# Altium PCB PCB_2023-03-13.pcbdoc
Units mil, origin at the board's own origin, x right, y up, seen from the top; angles counter-clockwise.
Board outline 3940 x 3010 mil, 2 copper layers (Top Layer, Bottom Layer); 27 components, 54 nets, 131 pads, 35 vias.
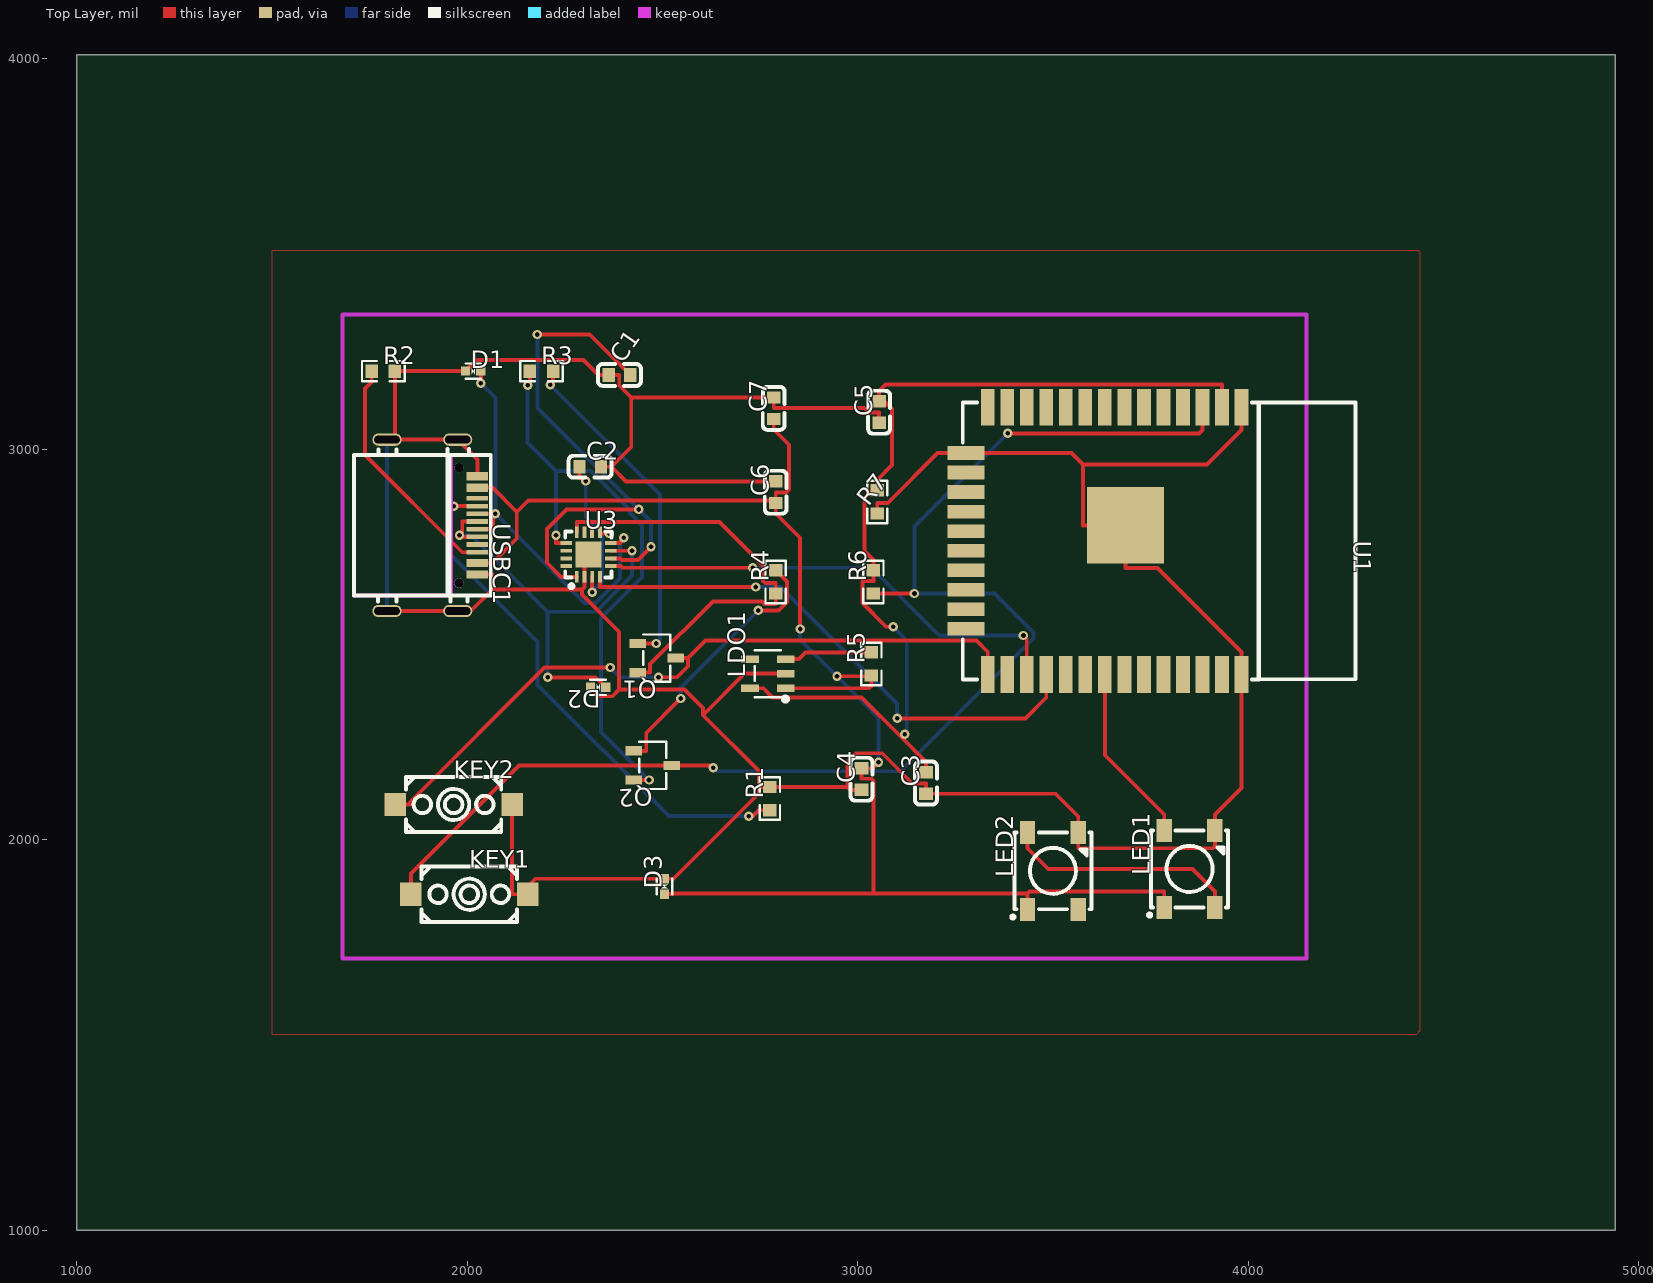
[diagram p0: Top Layer view]
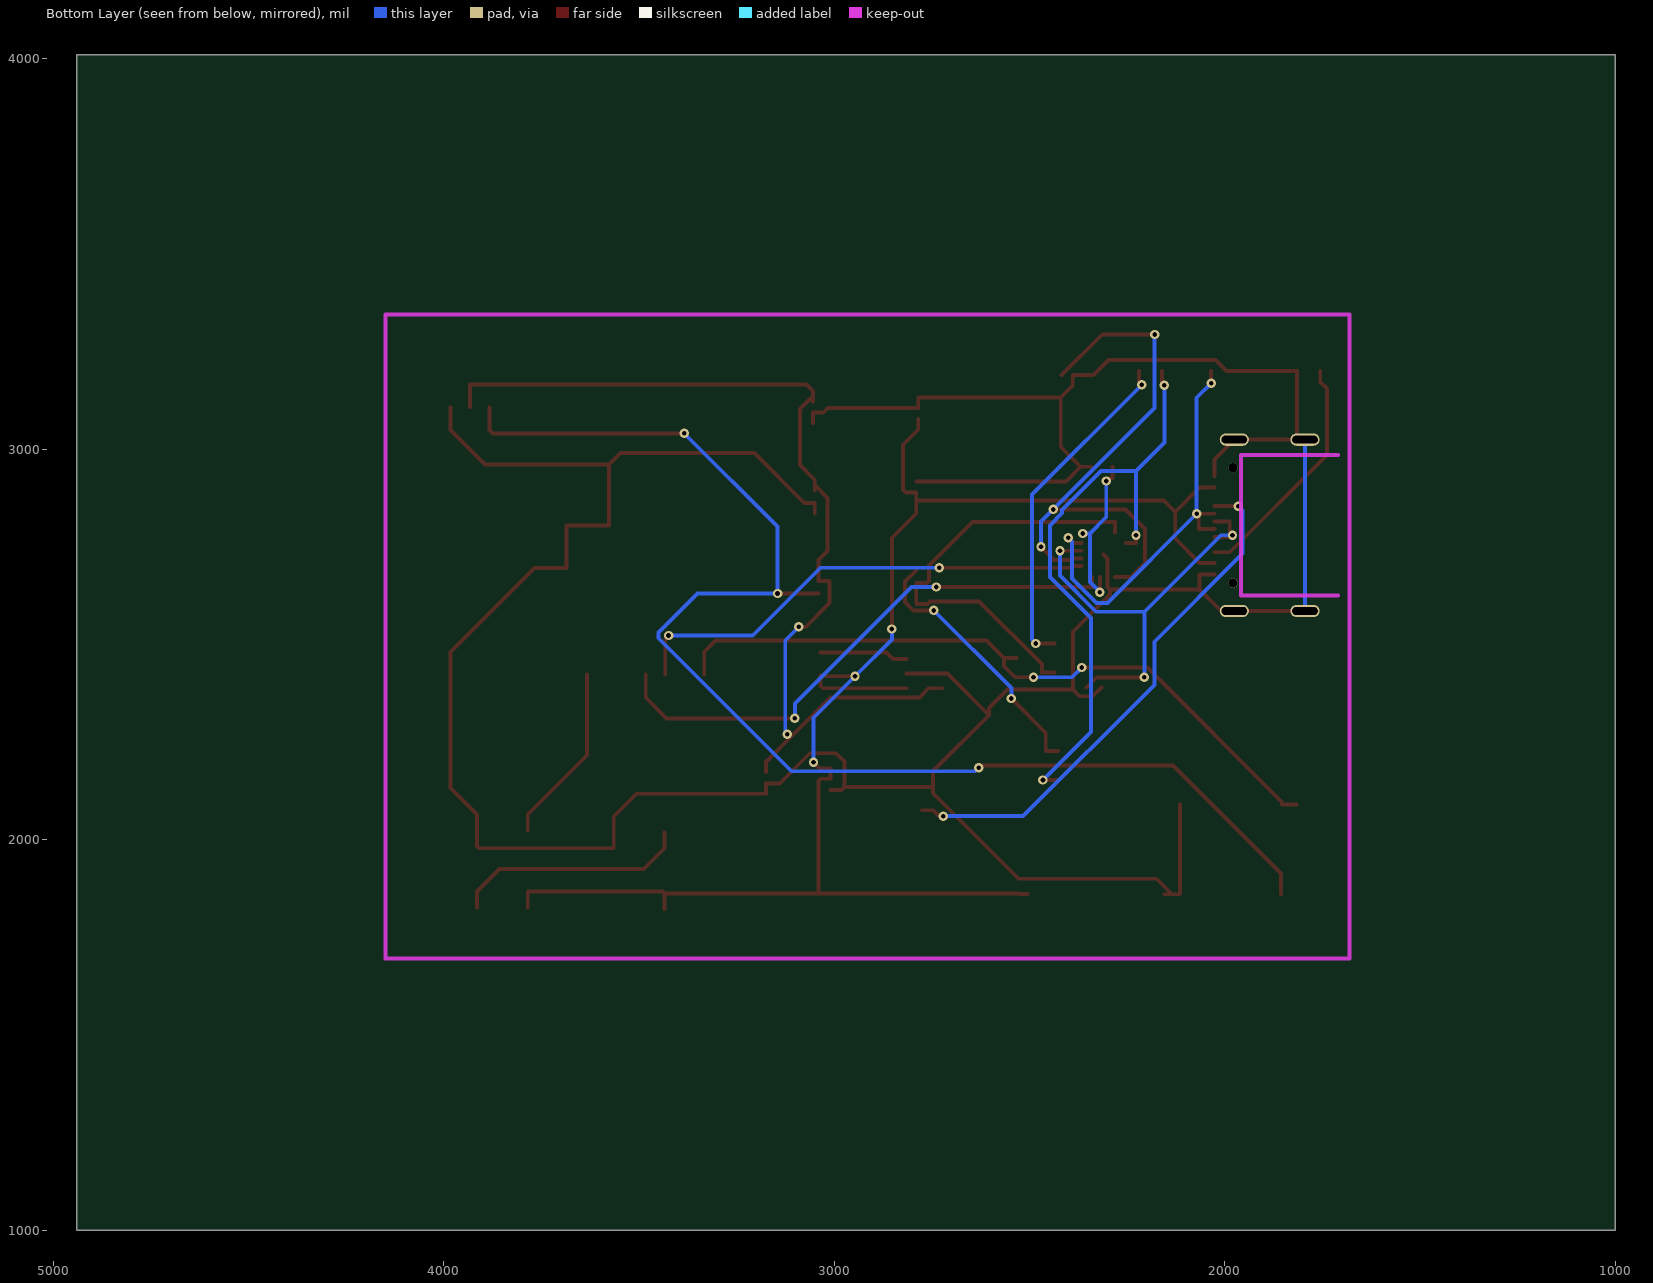
[diagram p1: Bottom Layer view, seen from below]

## Layer stack, top to bottom
Top Layer: signal copper (thickness not stored)
Dielectric: dielectric 12.6, FR-4, Dk 4.8
Bottom Layer: signal copper (thickness not stored)

## Board outline
4940,1000 1000,1000 1000,4010 4940,4010

## Components (designator, comment, footprint, x,y, rotation, side; value= is the part's Value field where it differs from the comment)
C1 "100uF" C0603 2390,3190 r0 top
C2 "10uF" C0603 2315,2955 r0 top
C3 "10uF" C0603 3175,2145 r90 top
C4 "10uF" C0603 3010,2155 r90 top
C5 "100uF" C0603 3055,3095 r90 top
C6 "0.1uF" C0603 2790,2890 r90 top
C7 "0.1uF" C0603 2785,3105 r90 top
D1 "BDFN2C051V" X1SON-2_L1.0-W0.6-P0.65-BI 2015,3200 r0 top
D2 "BDFN2C051V" X1SON-2_L1.0-W0.6-P0.65-BI 2335,2390 r180 top
D3 "BDFN2C051V" X1SON-2_L1.0-W0.6-P0.65-BI 2505,1880 r90 top
KEY1 "K2-3.6×6.1_SMD" KEY-SMD_2P-L6.2-W3.6-LS8.0 2005,1860 r0 top
KEY2 "K2-3.6×6.1_SMD" KEY-SMD_2P-L6.2-W3.6-LS8.0 1965,2090 r0 top
LDO1 "ME6211C33M5G-N" SOT-23-5_L3.0-W1.7-P0.95-LS2.8-BL 2770,2425 r90 top
LED1 "WS2812B-B" LED-SMD_4P-L5.0-W5.0-BL_TC5050RGB 3850,1925 r90 top
LED2 "WS2812B-B" LED-SMD_4P-L5.0-W5.0-BL_TC5050RGB 3500,1920 r90 top
Q1 "S8050_C105433" SOT-23-3_L2.9-W1.6-P1.90-LS2.8-BR 2485,2465 r180 top
Q2 "S8050_C105433" SOT-23-3_L2.9-W1.6-P1.90-LS2.8-BR 2475,2190 r180 top
R1 "5.1k" R0603 2775,2105 r90 top
R2 "5.1k" R0603 1785,3200 r0 top
R3 "10k" R0603 2190,3200 r0 top
R4 "10k" R0603 2790,2660 r90 top
R5 "10k" R0603 3035,2450 r90 top
R6 "10k" R0603 3040,2660 r90 top
R7 "10k" R0603 3050,2865 r90 top
U1 "ESP32-WROOM-32(8MB)" WIFIM-SMD_39P-L25.5-W18.0-P1.27 3630,2765 r270 top
U3 "CH343P" TQFN-16_L3.0-W3.0-P0.50-BL-EP1.7 2310,2730 r0 top
USBC1 "TYPE-C-31-M-14" USB-C-SMD_12P-P0.50-H-F_TYPE-C-31-M-14 1910,2805 r270 top

## Footprints (in the part's own frame and the unit in brackets; to place one, negate y for a bottom-side part, rotate by r counter-clockwise, add the part's x,y. Pads: shape width x height; smd on the part's side, far side on the other; paste and mask are expansions set on the pad)
C0603 [mm]
  rect 0.8x0.9 smd: 1(-0.7,0) 2(0.7,0)
  silkscreen extent -1.41,-0.71 1.39,0.72
KEY-SMD_2P-L6.2-W3.6-LS8.0 [mm]
  rect 1.4x1.5 smd: 1(-3.8,0) 2(3.8,0)
  silkscreen extent -3.1,-1.8 3.1,1.8
LED-SMD_4P-L5.0-W5.0-BL_TC5050RGB [mm]
  rect 1.5x1 smd: 1(-2.5,1.65) 2(-2.5,-1.65) 3(2.5,-1.65) 4(2.5,1.65)
  silkscreen extent -3.1,-2.5 2.5,2.7
R0603 [mil]
  rect 31.75x34.02 smd: 1(-29.66,0) 2(29.66,0)
  silkscreen extent -55,-26 55,26
SOT-23-3_L2.9-W1.6-P1.90-LS2.8-BR [mm]
  rect 1.07x0.6 smd: 1(1.235,-0.95) 2(1.235,0.95) 3(-1.235,0)
  silkscreen extent -0.88,-1.54 0.88,1.54
SOT-23-5_L3.0-W1.7-P0.95-LS2.8-BL [mm]
  rect 0.49x1.157 smd: 1(-0.95,-1.154) 2(0,-1.154) 3(0.95,-1.154)
  rect 0.49x1.175 smd: 4(0.95,1.154) 5(-0.95,1.154)
  silkscreen extent -1.8,-1.29 1.53,0.85
TQFN-16_L3.0-W3.0-P0.50-BL-EP1.7 [mm]
  rect 0.25x0.75 smd: 1(-0.748,-1.45) 2(-0.249,-1.45) 3(0.252,-1.45) 4(0.751,-1.45) 9(0.75,1.45) 10(0.25,1.45) 11(-0.25,1.45) 12(-0.749,1.45)
  rect 0.75x0.25 smd: 5(1.45,-0.75) 6(1.45,-0.25) 7(1.45,0.25) 8(1.45,0.75) 13(-1.45,0.75) 14(-1.45,0.25) 15(-1.45,-0.25) 16(-1.45,-0.75)
  rect 1.7x1.7 smd: 17(0,0)
  silkscreen extent -1.5,-2.17 1.5,1.5
USB-C-SMD_12P-P0.50-H-F_TYPE-C-31-M-14 [mm]
  rect 0.55x1.4 smd: A1B12(-3.2,2.94) A4B9(-2.45,2.94) B1A12(3.2,2.94) B4A9(2.45,2.94)
  rect 0.3x1.4 smd: A5(-1.249,2.94) A6(-0.251,2.94) A7(0.25,2.94) A8(1.25,2.94) B5(1.75,2.94) B6(0.75,2.94) B7(-0.751,2.94) B8(-1.749,2.94)
  oval 0.8x1.9 hole 0.5 slot 1.65 at 90 deg: S(-5.575,1.66) S(-5.575,-2.94) S(5.575,1.66) S(5.575,-2.94)
  round 0.6 hole 0.6 unplated: ""(-3.75,1.74) ""(3.75,1.74)
  Keep-Out Layer lines w0.254: 4.572,-5.1 4.572,1.215 4.445,1.215 -4.572,1.215 -4.572,-5.1
  silkscreen extent -4.95,-5.08 4.95,3.81
WIFIM-SMD_39P-L25.5-W18.0-P1.27 [mm]
  rect 2.4x0.9 smd: 1(-8.7,8.965) 2(-8.7,7.695) 3(-8.7,6.425) 4(-8.7,5.155) 5(-8.7,3.885) 6(-8.7,2.615) 7(-8.7,1.345) 8(-8.7,0.075) 9(-8.7,-1.195) 10(-8.7,-2.465) 11(-8.7,-3.735) 12(-8.7,-5.005) 13(-8.7,-6.275) 14(-8.7,-7.545) 25(8.7,-7.545) 26(8.7,-6.275) 27(8.7,-5.005) 28(8.7,-3.735) 29(8.7,-2.465) 30(8.7,-1.195) 31(8.7,0.075) 32(8.7,1.345) 33(8.7,2.615) 34(8.7,3.885) 35(8.7,5.155) 36(8.7,6.425) 37(8.7,7.695) 38(8.7,8.965)
  rect 0.9x2.4 smd: 15(-5.715,-8.965) 16(-4.445,-8.965) 17(-3.175,-8.965) 18(-1.905,-8.965) 19(-0.635,-8.965) 20(0.635,-8.965) 21(1.905,-8.965) 22(3.175,-8.965) 23(4.445,-8.965) 24(5.715,-8.965)
  rect 5x5 smd: 39(-1.017,1.422)
  silkscreen extent -9.02,-9.17 9.02,16.39
X1SON-2_L1.0-W0.6-P0.65-BI [mm]
  rect 0.6x0.6 smd: 1(-0.5,0) 2(0.5,0)
  silkscreen extent -0.5,-0.5 0.5,0.5

## Via types
v1: diameter 24, hole 12, Top Layer to Bottom Layer, tented both sides, 35 vias

## Nets (pads, with @x,y where several pads share a name; then routed paths per layer and width w, separated by ;. In a path a pad name is that pad's centre, name@x,y a point inside that pad or via, vN(x,y) a via of type N, cw(c..) or ccw(c..) an arc to the next point about the centre after c; other vN are vias at no path point)
+5V: C2.1 U3.3 U3.9 | length 443.5
  Top Layer w10: C2.1 2287.44,2926.27 2295.63,2926.27 v1(2303.45,2918.45) ; v1(2319.91,2634) U3.3 ; U3.9 2342.45,2784.17 v1(2363.94,2784.17)
  Bottom Layer w10: v1(2303.45,2918.45) 2303.45,2826.02 2345.3,2784.17 ; v1(2319.91,2634) 2345.3,2659.39 2345.3,2784.17 ; v1(2363.94,2784.17) 2345.3,2784.17
EN: KEY1.1 Q2.3 R6.1 U1.3 | length 3446
  Top Layer w10: KEY1.1 1855.4,1913.05 2132.35,2190 Q2.3 2624.35,2190 v1(2630.22,2184.13) ; R6.1 v1(3145.22,2630.34) ; v1(3384.27,3040.68) 3874.38,3040.68 3882.96,3049.26 U1.3
  Bottom Layer w10: v1(2630.22,2184.13) 2639.24,2175.11 3109.45,2175.11 3450.13,2515.79 3450.13,2530.79 3350.58,2630.34 v1(3145.22,2630.34) 3145.22,2801.63 v1(3384.27,3040.68)
ESP_RX: U1.27 U3.5 | length 1234.8
  Top Layer w10: U3.5 2392.86,2700.48 2397.04,2696.3 v1(2730.85,2696.3) ; v1(3424.45,2522.73) 3432.96,2514.22 U1.27
  Bottom Layer w10: v1(2730.85,2696.3) 3035.16,2696.3 3208.73,2522.73 v1(3424.45,2522.73)
ESP_TX: U1.28 U3.4 | length 1411.5
  Top Layer w10: U3.4 2339.59,2647.14 v1(2739.01,2647.14) ; v1(3101.12,2310.52) 3429.25,2310.52 3482.96,2364.23 U1.28
  Bottom Layer w10: v1(2739.01,2647.14) 2802.71,2647.14 3101.12,2348.73 v1(3101.12,2310.52)
GND: C1.1 C2.2 C3.1 C4.1 C5.1 C6.2 C7.2 D1.1 D2.2 D3.2 KEY1.2 KEY2.2 LDO1.2 LED1.3 LED2.3 R1.2 R2.2 R7.1 U1.1 U1.15 U1.38 U1.39 U3.2 U3.17 USBC1.A1B12 USBC1.B1A12 USBC1.S | length 9627.2
  Top Layer w10: USBC1.S@1794.25,2585.51 1975.36,2585.51 2008.91,2585.51 2064.32,2640.92 ; USBC1.S@1794.25,3024.49 USBC1.S@1814.66,3024.49 ; USBC1.B1A12 2064.32,2679.02 2064.32,2640.92 ; USBC1.A1B12 2025.75,2974.1 1975.36,3024.49 USBC1.S@1814.66,3024.49 ; KEY2.2 2114.6,1861.44 2116.04,1860 KEY1.2@2135.32,1860 ; KEY1.2 KEY1.2@2135.32,1860 ; U3.17 2300.22,2720.2 U3.2 2300.22,2647.15 2293.99,2640.92 ; D2.2 2338.19,2367.13 2371.44,2367.13 2388.88,2384.57 ; C2.2 2369.32,2955 ; C6.2 2406.76,2917.56 2369.32,2955 ; LDO1.2 2710.29,2425 2603.8,2318.51 ; C4.1 2981.27,2127.44 2974.05,2134.66 ; R7.1 3050,2862.23 3076.89,2862.23 3204.66,2990 U1.15 3547.32,2990 3576.56,2960.76 ; C5.1 3055,3094.2 3028.24,3094.2 3016.64,3105.8 2785,3105.8 C7.2 2419.88,3132.56 ; U1.1 3982.96,3049.26 3894.46,2960.76 3576.56,2960.76 ; USBC1.S@1814.66,3024.49 R2.2 D1.1 2023.39,3228.07 2297.61,3228.07 2335.68,3190 C1.1 2375.82,3190 2389.2,3190 2389.2,3163.24 2419.88,3132.56 ; 2064.32,2640.92 2293.99,2640.92 ; KEY1.2@2135.32,1860 2175.01,1899.69 D3.2 2527.82,1899.69 2746.98,2118.85 2746.98,2134.66 ; 2293.99,2640.92 2293.99,2627.33 2388.88,2532.44 2388.88,2384.57 ; 2369.32,2955 2419.88,3005.56 2419.88,3132.56 ; 2388.88,2384.57 2556.17,2384.57 2603.8,2336.94 2603.8,2318.51 ; 2603.8,2318.51 2746.98,2175.33 2746.98,2134.66 ; 2746.98,2134.66 R1.2 2974.05,2134.66 ; 2974.05,2134.66 2974.05,2199.97 2995.29,2221.21 3062.79,2221.21 3139.8,2144.2 3175,2144.2 C3.1 3506.52,2117.44 3564.97,2058.99 LED2.3 3564.97,1998.15 3564.97,1977.87 3909.97,1977.87 3914.97,1982.87 LED1.3 3914.97,2063.99 3982.96,2131.98 U1.38 3982.96,2480.74 3768.1,2695.6 3685.99,2695.6 U1.39 3576.56,2805.04 3576.56,2960.76
  Bottom Layer w10: USBC1.S@1794.25,2585.51 USBC1.S@1794.25,3024.49
GPIO0: KEY2.1 Q1.3 U1.25 | length 1862.6
  Top Layer w10: KEY2.1 1853.97,2090 1853.97,2096.51 2198.21,2440.75 v1(2365.83,2440.75) ; v1(2489.69,2415.83) 2537.36,2415.83 2565.7,2444.17 2565.7,2465 ; U1.25 3332.96,2480.74 3303.79,2509.91 2610.61,2509.91 2565.7,2465 ; 2565.7,2465 Q1.3 2565.7,2465
  Bottom Layer w10: v1(2365.83,2440.75) 2390.75,2415.83 v1(2489.69,2415.83)
GPIO19: LED1.4 U1.31 | length 462.1
  Top Layer w10: U1.31 3632.96,2216.07 3785.04,2063.99 LED1.4
LDO1_3: LDO1.3 R5.2 | length 226.7
  Top Layer w10: LDO1.3 2849.21,2462.4 2866.47,2479.66 R5.2
LED1_2: LED1.2 LED2.4 | length 606.9
  Top Layer w10: LED2.4 3435.04,1977.87 3487.93,1924.98 3857.08,1924.98 3914.97,1867.09 LED1.2
Q1_1: Q1.1 R3.2 | length 868.6
  Top Layer w10: v1(2212.58,3164.9) 2219.66,3171.98 R3.2 ; Q1.1 2468.46,2502.4 v1(2483.92,2502.4)
  Bottom Layer w10: v1(2212.58,3164.9) 2493.68,2883.8 2493.68,2512.16 v1(2483.92,2502.4)
Q2_1: Q2.1 R4.2 | length 686.3
  Top Layer w10: Q2.1 2458.46,2227.4 2458.46,2273.37 v1(2546.61,2361.52) ; v1(2745.31,2587.09) 2797.73,2587.09 2818.89,2608.25 2818.89,2660.77 R4.2
  Bottom Layer w10: v1(2546.61,2361.52) 2546.61,2388.39 v1(2745.31,2587.09)
U1_4: U1.4
U1_5: U1.5
U1_6: U1.6
U1_7: U1.7
U1_8: U1.8
U1_9: U1.9
U1_10: U1.10
U1_11: U1.11
U1_12: U1.12
U1_13: U1.13
U1_14: U1.14
U1_16: U1.16
U1_17: U1.17
U1_18: U1.18
U1_19: U1.19
U1_20: U1.20
U1_21: U1.21
U1_22: U1.22
U1_23: U1.23
U1_24: U1.24
U1_26: U1.26
U1_29: U1.29
U1_30: U1.30
U1_32: U1.32
U1_33: U1.33
U1_34: U1.34
U1_35: U1.35
U1_36: U1.36
U1_37: U1.37
U3_1: C1.2 U3.1 U3.6 | length 1498.7
  Top Layer w10: v1(2179.36,3293.88) 2313.68,3293.88 C1.2 ; U3.1 2240.35,2672.92 2204.05,2709.22 2204.05,2795.47 2254.35,2845.77 v1(2439.41,2845.77) ; U3.6 2392.86,2720.16 2396.48,2716.54 2437.32,2716.54 v1(2470.63,2749.85)
  Bottom Layer w10: v1(2179.36,3293.88) 2179.36,3105.82 v1(2439.41,2845.77) 2470.63,2814.55 v1(2470.63,2749.85)
U3_10: U3.10
U3_11: U3.11
U3_12: Q1.2 R4.1 U3.12 | length 1122.2
  Top Layer w10: U3.12 2280.51,2812.86 2281.24,2813.59 2646.42,2813.59 2757.62,2702.39 2757.62,2662.72 2763.11,2657.23 2790,2657.23 R4.1 2790,2603.46 2761.55,2603.46 2754.87,2610.14 2629.08,2610.14 2468.46,2449.52 2468.46,2427.6 Q1.2
U3_13: Q2.2 R3.1 U3.13 | length 1567.4
  Top Layer w10: v1(2154.45,3163.6) 2160.34,3169.49 R3.1 ; v1(2227.15,2779.42) 2227.15,2759.53 U3.13 ; Q2.2 2458.46,2152.6 v1(2465.58,2152.6)
  Bottom Layer w10: v1(2154.45,3163.6) 2154.45,3016.67 2227.15,2943.97 ; v1(2227.15,2779.42) 2227.15,2943.97 ; v1(2465.58,2152.6) 2342.77,2275.41 2342.77,2567.7 2447.58,2672.51 2447.58,2805.01 2416.36,2836.23 2416.36,2844.27 2316.66,2943.97 2227.15,2943.97
U3_14: U3.14
U3_15: U3.15
U3_16: U3.16
USBC1_A5: R1.1 USBC1.A5 | length 1357.2
  Top Layer w10: v1(1964.98,2854.17) USBC1.A5 ; v1(2720.78,2059.99) 2731.63,2059.99 2746.98,2075.34 R1.1
  Bottom Layer w10: v1(1964.98,2854.17) 1954.34,2843.53 1954.34,2732.41 2180.03,2506.72 2180.03,2396.19 2516.23,2059.99 v1(2720.78,2059.99)
USBC1_A6: D2.1 U3.7 USBC1.A6 USBC1.B6 | length 1131.1
  Top Layer w10: v1(1980.16,2779.56) v1@1987.13,2779.56 ; USBC1.B6 2010.45,2775.47 1987.18,2775.47 1987.13,2775.52 v1@1987.13,2779.56 ; USBC1.A6 2006.47,2814.87 1987.18,2814.87 1987.13,2814.82 v1@1987.13,2779.56 ; v1(2205.7,2415.64) 2329.05,2415.64 D2.1 ; U3.7@2367.09,2739.85 v1(2422.03,2739.85)
  Bottom Layer w10: v1(1980.16,2779.56) 2009.9,2779.56 2205.7,2583.76 ; v1(2205.7,2415.64) 2205.7,2583.76 ; v1(2422.03,2739.85) 2422.03,2676.27 2329.52,2583.76 2205.7,2583.76
USBC1_A7: D1.2 U3.8 USBC1.A7 USBC1.B7 | length 1096.1
  Top Layer w10: USBC1.A7 2064.32,2795.17 2066.43,2797.28 v1@2066.43,2834.57 ; USBC1.B7 2060.34,2834.57 v1@2066.43,2834.57 ; v1(2034.69,3168.8) D1.2 ; v1(2071.73,2834.57) v1@2066.43,2834.57 ; U3.8 2392.86,2759.53 2392.86,2765.14 v1(2400.8,2773.08)
  Bottom Layer w10: v1(2034.69,3168.8) 2071.73,3131.76 v1(2071.73,2834.57) 2300.07,2606.23 2328.12,2606.23 2390.63,2668.74 2390.63,2762.91 v1(2400.8,2773.08)
USBC1_B5: R2.1 USBC1.B5 | length 612.5
  Top Layer w10: R2.1 1755.34,3171.98 1738.45,3155.09 1738.45,2984.83 1987.18,2736.1 USBC1.B5
VBUS: C4.2 C6.1 C7.1 D3.1 LDO1.1 LED1.1 LED2.1 R5.1 USBC1.A4B9 USBC1.B4A9 | length 4131.8
  Top Layer w10: USBC1.B4A9 2064.32,2708.54 2126.55,2770.77 2126.55,2839.23 ; USBC1.A4B9 2064.32,2901.46 2126.55,2839.23 ; D3.1 2527.82,1860.32 2529.59,1862.09 3040.95,1862.09 ; C7.1 2785,3050.68 2824.22,3011.46 2824.22,2896.66 2816.76,2889.2 2790,2889.2 C6.1@2790,2867.08 ; LDO1.1 2849.21,2387.6 3029.14,2387.6 3035,2393.46 3035,2416.33 R5.1@3035,2418.34 ; v1(2852.49,2539.31) 2852.49,2773.19 2790,2835.68 C6.1 2790,2864.76 C6.1@2790,2867.08 ; v1(2947.03,2418.34) R5.1@3035,2418.34 ; R5.1 R5.1@3035,2418.34 ; v1(3053.23,2198.16) 3038.73,2183.66 3038.73,2182.56 C4.2 3010,2155.8 3035.53,2155.8 3040.95,2150.38 3040.95,1862.09 ; LED2.1 3435.04,1862.09 ; LED1.1 3785.04,1867.09 3440.04,1867.09 3435.04,1862.09 ; 2126.55,2839.23 2156.14,2868.82 2788.26,2868.82 C6.1@2790,2867.08 ; 3040.95,1862.09 3435.04,1862.09
  Bottom Layer w10: v1(2852.49,2539.31) 2852.49,2512.88 v1(2947.03,2418.34) 3053.23,2312.14 v1(3053.23,2198.16)
VCC: C3.2 C5.2 LDO1.5 R6.2 R7.2 U1.2 | length 2555.3
  Top Layer w10: LDO1.5 2758.72,2387.6 2782.14,2364.18 3010.14,2364.18 v1@3112.24,2262.09 ; R7.2 R7.2@3050,2908.1 ; C5.2 C5.2@3055,3135.94 ; v1(3090.74,2545.32) 3072.93,2545.32 3011.93,2606.32 3011.93,2661.59 3013.11,2662.77 3040,2662.77 R6.2 3040,2696.38 3040,2716.54 3016.93,2739.61 3016.93,2875.03 R7.2@3050,2908.1 ; v1(3120.26,2270.11) v1@3112.24,2262.09 ; C3.2 3175,2199.32 v1@3112.24,2262.09 ; U1.2 3932.96,3165.77 3932.91,3165.82 3071.5,3165.82 3055,3149.32 C5.2@3055,3135.94 ; R7.2@3050,2908.1 3050,2921.54 3087.94,2959.48 3087.94,3103 C5.2@3055,3135.94
  Bottom Layer w10: v1(3090.74,2545.32) 3125.58,2510.48 3125.58,2275.43 v1(3120.26,2270.11)
pads on no net: LDO1.4 LED2.2 USBC1. USBC1.A8 USBC1.B8

## Polygon pours and split planes (outlines as drawn)
GND on Top Layer (solid): 1500,3510 4435,3510 4440,3505 4440,1510 4430,1500 1500,1500